# Altium PCB ORCS4.PcbDoc (part 2 of 2)
Units mm, origin at the board's own origin, x right, y up, seen from the top; angles counter-clockwise.
Board outline 75.18 x 74.8 mm, 2 copper layers (Top Layer, Bottom Layer); 94 components, 96 nets, 440 pads, 113 vias.
Unrouted connection lines stored in the file: 4.
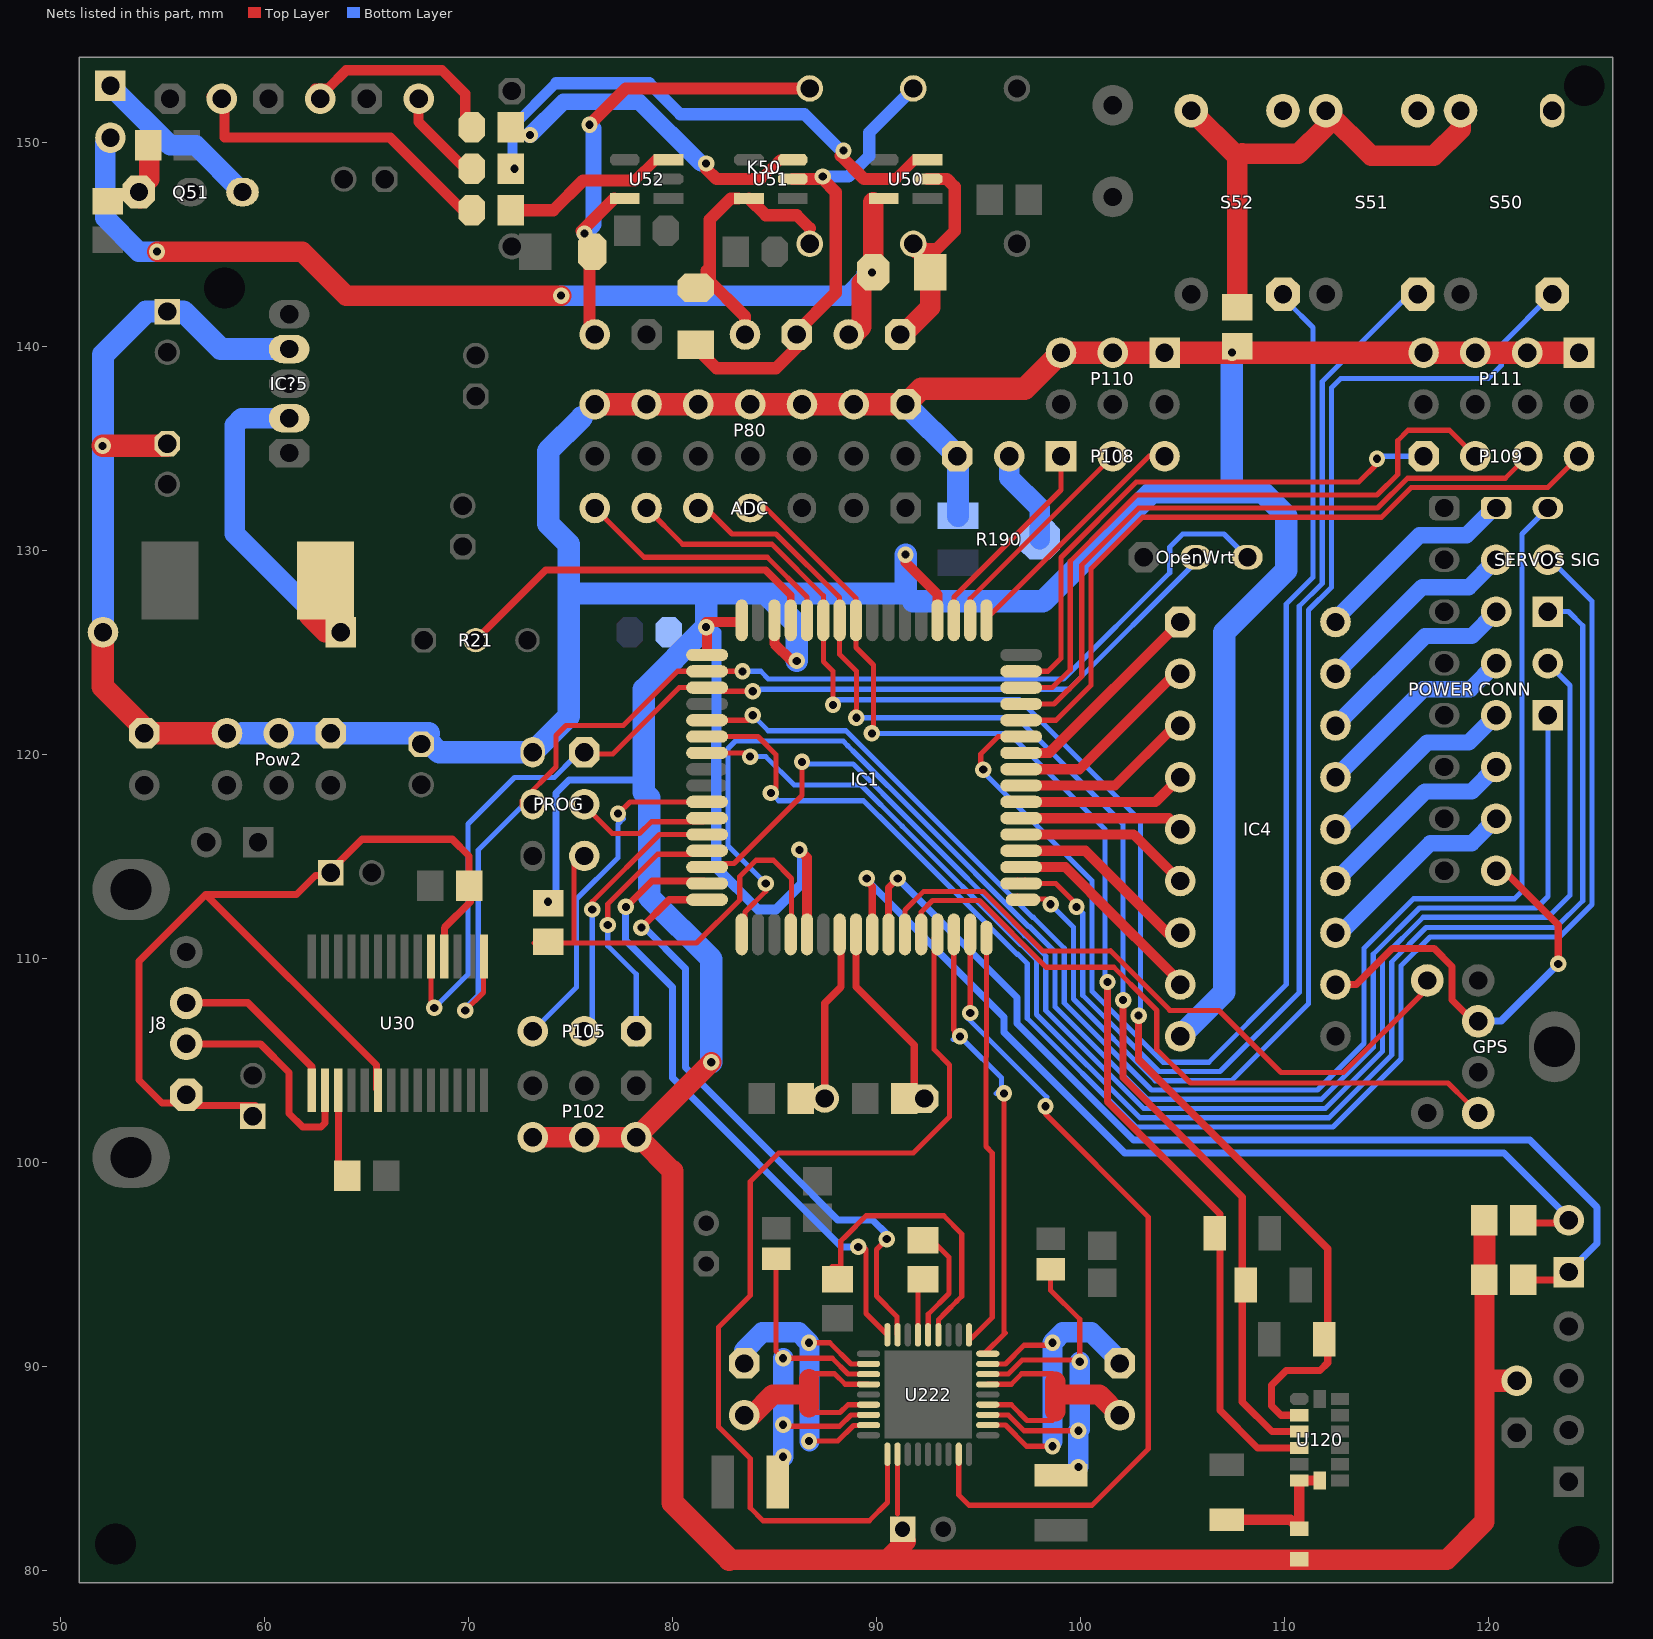
[diagram p2: the nets of this part, all layers, seen from the top]

## Via types
v1: diameter 0.8, hole 0.4, Top Layer to Bottom Layer, 97 vias
v2: diameter 0.66, hole 0.33, Top Layer to Bottom Layer, tented top, 16 vias

## Nets (pads, with @x,y where several pads share a name; then routed paths per layer and width w, separated by ;. In a path a pad name is that pad's centre, name@x,y a point inside that pad or via, vN(x,y) a via of type N, cw(c..) or ccw(c..) an arc to the next point about the centre after c; other vN are vias at no path point) (continued)
MEMSX: ADC.6 C201.1 IC1.59 U120.2 | length 70
  Top Layer w0.254: ADC.6@78.74,132.08 80.518,130.302 84.887,130.302 87.408,127.781 IC1.59@87.408,126.572 87.408,124.555 87.884,124.079 v1(87.884,122.428)
  Top Layer w0.35: v1(102.87,107.188) 102.87,105.029 108.585,99.314 112.141,95.758 112.141,90.17 111.76,89.789 110.109,89.789 109.385,89.065 109.385,88.062 109.855,87.592 U120.2@110.744,87.592
  Bottom Layer w0.254: v1(87.884,122.428) 88.138,122.682 97.028,122.682 102.997,116.713 ; v1(102.87,107.188) 102.99,107.188 102.962,107.541 102.962,116.713
MEMSY: ADC.5 C203.2 IC1.58 U120.3 | length 64.3
  Top Layer w0.254: ADC.5@81.28,132.08 81.661,132.08 82.931,130.81 85.09,130.81 88.208,127.692 IC1.58@88.208,126.572 88.208,124.898 89.027,124.079 89.027,122.174 88.9,122.047 v1@88.9,121.92
  Top Layer w0.35: v1@102.095,107.95 102.095,104.153 107.95,98.298 107.95,88.249 109.407,86.792 U120.3@110.744,86.792
  Bottom Layer w0.254: v1(89.027,121.793) 96.901,121.793 102.108,116.586 102.108,108.966 v1(102.108,107.95)
MEMSZ: ADC.4 C202.2 IC1.57 U120.4 | length 62.9
  Top Layer w0.254: ADC.4@83.82,132.08 84.582,132.08 89.008,127.654 IC1.57@89.008,126.572 89.008,125.241 89.867,124.382 89.867,121.219 v1@89.596,121.219
  Top Layer w0.35: v1@101.333,108.725 101.333,102.978 106.854,97.457 106.854,87.837 108.699,85.992 U120.4@110.744,85.992
  Bottom Layer w0.254: v1(89.789,121.031) 96.52,121.031 101.219,116.332 v1@101.219,108.966 ; v1(101.346,108.839) v1@101.6,108.839
Net5_1: 5.1 IC1.17 | length 75.3
  Top Layer w0.254: IC1.17@83.408,111.172 83.566,111.33 83.566,112.268 84.582,113.284 v1(84.582,113.665)
  Bottom Layer w0.254: v1(84.582,113.665) 82.731,115.516 82.731,120.286 83.095,120.65 88.385,120.65 88.608,120.427 89.034,120.001 92.183,116.852 97.472,111.563 97.512,111.563 98.768,110.307 98.768,107.628 103.307,103.089 111.831,103.089 114.373,105.631 114.373,110.203 116.638,112.468 122.374,112.468 122.936,113.03 5.1@122.936,121.92
Net5_2: 5.2 IC1.14 | length 72.8
  Top Layer w0.254: IC1.14@81.708,114.472 81.881,114.645 83.022,114.645 86.36,117.983 v1(86.36,119.634)
  Bottom Layer w0.254: v1(86.36,119.634) 86.471,119.523 88.87,119.523 91.729,116.664 97.284,111.109 97.324,111.109 98.314,110.119 98.314,107.44 103.119,102.635 112.019,102.635 114.827,105.443 114.827,110.015 116.826,112.014 122.936,112.014 124.013,113.091 124.013,123.383 5.2@122.936,124.46
NetC1_1: C1.1 IC1.24 XTAL.1 | length 9.4
  Top Layer w0.35: IC1.24@89.008,111.172 89.008,108.604 91.865,105.747 91.865,103.615 XTAL.1@92.356,103.124
NetC2_1: C2.1 IC1.23 XTAL.2 | length 8.4
  Top Layer w0.35: XTAL.2@87.476,103.124 87.476,107.796 88.265,108.585 88.265,111.115 IC1.23@88.208,111.172
NetC14_1: C14.1 C15.1 C16.1 J8.1 U30.4 U30.20 | length 49.9
  Top Layer w0.35: J8.1@56.17,103.307 55.765,102.902 54.975,102.902 53.848,104.029 53.848,109.855 57.127,113.134 ; J8.1@56.297,102.775 C15.1@59.563,102.775 ; U30.20@65.573,103.532 65.498,103.607 65.498,104.762 57.127,113.134 ; U30.4@68.823,110.082 68.823,111.495 70.104,112.776 70.104,113.488 C16.1@70.038,113.554 ; C16.1@69.839,113.355 C16.1@70.038,113.554 ; 57.127,113.134 61.572,113.134 62.5,114.062 63.008,114.062 64.786,115.84 69.215,115.84 70.038,115.017 C16.1@70.038,113.554
NetC17_1: C17.1 U30.17 | length 4.4
  Top Layer w0.35: U30.17@63.623,103.532 63.627,103.528 63.627,99.777 C17.1@64.074,99.33
NetC50_1: C50.1 U222.31 | length 13.9
  Top Layer w0.254: C50.1@87.849,94.895 88.265,94.895 88.265,96.132 88.519,96.386 89.507,97.374 93.31,97.374 94.199,96.485 94.199,93.945 94.199,93.43 93.952,93.183 93.444,92.675 93.048,92.279 U222.31@93.048,91.536
NetC51_1: C51.1 U222.33 | length 2.9
  Top Layer w0.254: C51.1@91.786,94.326 92.048,94.064 92.048,92.548 U222.33@92.048,91.536
NetC51_2: C51.2 U222.32 | length 5.8
  Top Layer w0.254: C51.2@92.294,96.165 92.741,96.165 93.564,95.342 93.564,93.952 93.564,93.564 92.548,92.548 U222.32@92.548,91.536
NetC63_1: C63.1 P300.2 P501.2 U50.5 | length 50.4
  Top Layer w0.6: C63.1@89.789,144.145 89.817,144.145 C63.1@89.857,144.185
  Top Layer w1: v1(54.737,144.653) 61.849,144.653 64.008,142.494 v1(74.549,142.494) ; P501.2@88.773,140.462 89.281,140.97 89.281,143.129 v1(89.789,143.637) ; C63.1@89.857,144.185 U50.5@89.857,147.066
  Bottom Layer w1: P300.2@52.451,150.241 52.197,149.987 52.197,146.304 53.848,144.653 v1(54.737,144.653) ; v1(74.549,142.494) 88.646,142.494 89.535,143.383 89.535,143.591 89.581,143.637 v1(89.789,143.637)
NetC63_2: C63.2 K50.11 P501.1 U50.2 | length 10.8
  Top Layer w0.35: C63.2@92.266,143.637 K50.11@92.266,144.589
  Top Layer w0.6: K50.11@92.075,144.78 92.964,144.78 93.853,145.669 93.853,147.828 93.472,148.209 U50.2@92.515,148.209
  Top Layer w1: P501.1@91.186,140.462 92.647,141.923 C63.2@92.647,143.637 ; K50.11@92.075,144.78 K50.11@92.266,144.589
NetC64_1: C64.1 K50.12 P502.2 U51.5 | length 14
  Top Layer w0.3: K50.12@86.741,145.034 86.741,145.796
  Top Layer w0.6: 81.694,143.731 81.694,143.35 83.566,141.478 P502.2@83.566,140.208 ; C64.1@81.788,142.748 81.84,142.8 81.84,146.229 82.87,147.259 U51.5@83.253,147.259 ; U51.5@83.761,147.259 84.589,146.431 86.106,146.431 86.741,145.796
NetC64_2: C64.2 K50.21 P502.1 U51.2 | length 23.9
  Top Layer w0.254: P502.1@86.36,140.208 P502.1@86.36,141.097
  Top Layer w0.6: C64.2@81.28,139.827 82.169,138.938 85.09,138.938 P502.1@86.36,140.208 ; U51.2@85.911,148.209 87.376,148.209 88.011,147.574 88.011,142.621 P502.1@86.042,140.653
  Bottom Layer w0.6: v1(87.376,148.336) 88.646,148.336 89.662,149.352 89.662,150.495 K50.21@91.821,152.654
NetC65_1: C65.1 K50.22 P503.2 U52.5 | length 23.8
  Top Layer w0.6: v1@75.566,145.668 U52.5@77.157,147.259 ; P503.2@75.946,140.208 C65.1@75.946,144.653 ; v1(75.946,150.876) 77.724,152.654 K50.22@86.741,152.654
  Bottom Layer w0.3: v1(75.946,150.876) v1@76.134,150.688
  Bottom Layer w0.8: v1(75.692,145.542) 76.134,145.984 v1@76.134,150.688
NetC200_2: C200.2 R200.1 U120.6 U120.7 | length 7.1
  Top Layer w0.5: C200.2@107.188,82.47 110.304,82.47 R200.1@110.744,82.03 U120.6@110.744,84.392 U120.7@111.744,84.392
NetD11_2: D11.2 IC?5.2 L1.1 | length 17.2
  Top Layer w1: D11.2@62.166,126.809 62.992,125.984 L1.1@63.737,125.984
  Bottom Layer w1: IC?5.2@61.214,136.476 58.879,136.476 58.547,136.144 58.547,130.81 63.373,125.984 L1.1@63.737,125.984
NetD50_2: D50.2 R50.2 | length 4.7
  Top Layer w0.5: D50.2@67.564,152.146 67.564,151.003 69.85,148.717 R50.2@70.17,148.717
NetD51_2: D51.2 R51.2 | length 10
  Top Layer w0.5: D51.2@62.484,152.654 63.119,152.654 64.008,153.543 68.707,153.543 69.85,152.4 69.85,151.069 R51.2@70.17,150.749
NetD52_2: D52.2 R52.2 | length 16.2
  Top Layer w0.5: D52.2@57.404,152.273 58.039,151.638 58.039,150.241 66.167,150.241 69.723,146.685 R52.2@70.17,146.685 ; R52.2@70.166,146.685 R52.2@70.166,147.01
NetDCMOTOR1_1: DCMOTOR1.1 U222.2 U222.8 | length 14.9
  Top Layer w0.254: v1@86.96,86.325 88.117,86.325 88.88,87.088 89.6,87.088 U222.8@89.623,87.111 ; v1@86.96,91.151 87.722,91.151 88.762,90.111 U222.2@89.623,90.111
  Bottom Layer w1: DCMOTOR1.1@83.531,90.516 83.531,90.77 84.42,91.659 86.198,91.659 v1(86.706,91.151) 86.73,91.127 v1@86.73,86.325
  other v1: 86.706,86.325
NetDCMOTOR1_2: DCMOTOR1.2 U222.4 U222.6 | length 12
  Top Layer w0.254: 86.706,87.976 86.452,87.722 88.23,87.722 88.619,88.111 U222.6@89.623,88.111 ; 86.706,89.373 86.452,89.627 87.962,89.627 88.478,89.111 U222.4@89.623,89.111
  Top Layer w1: DCMOTOR1.2@83.912,87.595 84.928,88.611 86.706,88.611 ; 86.706,87.976 86.706,89.373
NetDCMOTOR2_1: DCMOTOR2.1 U222.20 U222.26 | length 16.2
  Top Layer w0.254: U222.20@95.473,87.111 96.334,87.111 97.374,86.071 v1(98.644,86.071) ; U222.26@95.473,90.111 96.334,90.111 97.247,91.024 v1@98.644,91.024
  Bottom Layer w1: v1@98.644,86.325 v1(98.644,91.151) 99.152,91.659 100.549,91.659 DCMOTOR2.1@102.01,90.198
NetDCMOTOR2_2: DCMOTOR2.2 U222.22 U222.24 | length 13.1
  Top Layer w0.254: U222.22@95.473,88.111 96.618,88.111 97.388,87.341 98.644,87.341 98.644,87.787 ; U222.24@95.473,89.111 96.618,89.111 97.134,89.627 98.644,89.627 98.644,89.246 ; 98.644,88.23 98.644,88.357
  Top Layer w1: 98.771,87.787 98.771,88.611 ; 98.771,88.357 98.771,88.611 ; 98.771,89.246 98.771,88.611 ; DCMOTOR2.2@101.946,87.595 100.93,88.611 98.771,88.611
NetGPS_2: "POWER CONN.16" GPS.2 IC4.11 | length 21.8
  Top Layer w0.35: IC4.11@112.522,108.712 113.538,108.712 115.316,110.49 117.348,110.49 118.237,109.601 118.237,107.95 119.14,107.047 119.262,107.168 GPS.2@119.516,107.422 ; 120.396,114.681 120.587,114.49 123.444,111.633 v1(123.444,109.728)
  Bottom Layer w0.35: GPS.2@119.516,107.422 119.77,107.168 120.004,106.934 120.65,106.934 v1(123.444,109.728)
NetGPS_3: GPS.3 IC1.28 | length 33.9
  Top Layer w0.254: IC1.28@92.202,111.166 IC1.28@92.208,111.172 92.208,112.274 92.764,112.83 95.062,112.83 98.326,109.566 101.647,109.566 103.251,107.962 103.769,107.445 ; 103.759,107.435 103.759,106.725 103.759,105.537 105.41,103.886 118.044,103.886 119.008,102.922 GPS.3@119.516,102.922
NetGPS_6: GPS.6 IC1.27 | length 33.5
  Top Layer w0.254: IC1.27@91.408,111.172 91.408,112.363 92.329,113.284 95.25,113.284 98.171,110.363 101.473,110.363 ; 101.483,110.373 103.705,108.15 104.404,107.452 ; 104.394,107.442 105.41,107.442 106.807,107.442 109.855,104.394 112.903,104.394 116.762,108.253 116.762,108.914 116.762,109.168 GPS.6@117.016,109.422
NetI2C_1: I2C.1 IC1.26 R11.2 | length 50.8
  Top Layer w0.35: IC1.26@90.608,111.172 90.608,113.468 v1(91.059,113.919) ; R11.2@121.727,94.234 I2C.1@123.571,94.234
  Bottom Layer w0.35: v1(91.059,113.919) 96.904,108.074 96.904,106.804 102.616,101.092 121.412,101.092 ; 120.904,101.092 122.047,101.092 125.349,97.79 125.349,96.012 I2C.1@123.952,94.615
NetI2C_2: I2C.2 IC1.25 R10.2 | length 46.1
  Top Layer w0.35: v1@89.678,113.649 89.808,113.519 IC1.25@89.808,111.172 ; R10.2@122.362,97.028 123.571,97.028 I2C.2@124.079,97.536
  Bottom Layer w0.35: v1(89.535,113.919) 89.535,113.844 96.266,107.113 96.266,106.374 96.919,105.721 102.183,100.457 120.777,100.457 I2C.2@123.825,97.409
NetIC1_5: "SERVOS SIG.3" IC1.5 | length 75.3
  Top Layer w0.254: IC1.5@81.708,121.672 83.699,121.672 v1(83.947,121.92)
  Bottom Layer w0.254: v1(83.947,121.92) 84.709,121.158 88.519,121.158 89.062,120.615 89.488,120.189 92.637,117.04 97.66,112.017 97.7,112.017 99.222,110.495 99.222,107.816 103.495,103.543 111.643,103.543 113.919,105.819 113.919,110.49 116.351,112.922 121.304,112.922 121.666,113.284 121.666,130.81 122.936,132.08
NetIC1_6: "SERVOS SIG.2" IC1.6 | length 79.6
  Top Layer w0.254: IC1.6@81.708,120.872 84.196,120.872 85.09,119.978 85.09,118.364 v1(84.836,118.11)
  Bottom Layer w0.254: v1(84.836,118.11) 85.217,117.729 89.38,117.729 90.821,116.288 96.908,110.201 96.948,110.201 97.406,109.743 97.406,107.064 102.743,101.727 112.395,101.727 115.735,105.067 115.735,109.639 117.148,111.052 123.512,111.052 125.095,112.635 125.095,127.508 123.317,129.286 123.317,129.921
NetIC1_7: "SERVOS SIG.1" IC1.7 | length 74.5
  Top Layer w0.254: IC1.7@81.708,120.072 83.636,120.072 v1(83.82,119.888)
  Bottom Layer w0.254: v1(83.82,119.888) 84.582,119.888 85.979,118.491 89.26,118.491 91.275,116.476 97.096,110.655 97.136,110.655 97.86,109.931 97.86,107.252 102.931,102.181 112.207,102.181 115.281,105.255 115.281,109.827 116.96,111.506 123.324,111.506 124.641,112.823 124.641,126.311 123.952,127 122.936,127
NetIC1_10: IC1.10 P105.3 | length 17.8
  Top Layer w0.254: v1(77.343,117.094) 77.921,117.672 IC1.10@81.708,117.672
  Bottom Layer w0.254: P105.3@73.152,105.791 P105.3@73.152,106.426 ; P105.3@73.155,106.429 75.311,108.585 75.311,112.903 77.343,114.935 77.343,116.586 77.597,116.84 v1(77.343,117.094)
NetIC1_12: IC1.12 P105.2 | length 14.1
  Top Layer w0.254: v1(76.073,112.395) 76.073,112.776 79.369,116.072 IC1.12@81.708,116.072
  Bottom Layer w0.254: P105.2@75.692,105.791 P105.2@75.692,106.426 76.073,106.807 v1(76.073,112.395)
NetIC1_13: IC1.13 P105.1 | length 13.4
  Top Layer w0.254: v1(76.835,111.633) 76.835,112.661 79.273,115.099 81.535,115.099 IC1.13@81.708,115.272
  Bottom Layer w0.254: v1(76.835,111.633) 76.835,110.617 78.232,109.22 P105.1@78.232,106.426 P105.1@78.232,105.791
NetIC1_15: IC1.15 U222.36 | length 31.7
  Top Layer w0.254: v1(89.119,95.85) 89.373,95.85 89.5,95.723 89.5,92.584 U222.36@90.548,91.536
  Top Layer w0.35: v1(77.724,112.522) 78.999,113.797 81.583,113.797 IC1.15@81.708,113.672
  Bottom Layer w0.35: v1(77.724,112.522) 77.711,112.509 77.711,110.884 80.01,108.585 80.01,104.14 88.3,95.85 v1(89.119,95.85) v1@89.228,95.959
NetIC1_16: IC1.16 U222.35 | length 30.6
  Top Layer w0.254: v1(90.516,96.231) 90.008,95.723 90.008,93.437 91.025,92.42 91.025,91.559 U222.35@91.048,91.536
  Top Layer w0.35: v1(78.486,111.506) 79.852,112.872 81.244,112.872 IC1.16@81.708,112.872
  Bottom Layer w0.35: v1(78.486,111.506) 78.631,111.506 80.645,109.492 80.645,104.648 85.598,99.695 ; 85.725,99.568 85.598,99.695 ; v1(90.516,96.231) 90.516,96.485 89.826,97.175 88.118,97.175 85.598,99.695
NetIC1_29: IC1.29 U222.10 | length 47.4
  Top Layer w0.254: U222.10@90.548,85.686 90.548,83.309 89.662,82.423 84.455,82.423 83.82,83.058 83.82,85.471 82.261,87.03 82.261,91.913 83.82,93.472 83.82,99.06 85.217,100.457 91.821,100.457 93.599,102.235 93.599,104.775 92.837,105.537 92.837,111.001 IC1.29@93.008,111.172
NetIC1_30: IC1.30 U222.27 | length 23.2
  Top Layer w0.254: IC1.30@93.981,110.999 93.799,110.817 93.799,108.531 93.799,107.769 93.799,106.48 93.853,106.426 93.853,106.172 v1(94.107,106.172) ; U222.27@95.088,90.643 95.342,90.643 96.329,91.63 ; 96.266,91.63 v1(96.266,103.378)
  Bottom Layer w0.254: v1@93.759,106.012 94.267,106.012 94.361,105.918 96.139,104.14 96.139,103.632 95.885,103.378 v1(96.266,103.378) ; v1@93.853,106.172 v1(94.107,106.172)
NetIC1_31: IC1.31 U222.17 | length 41.3
  Top Layer w0.254: U222.17@94.048,85.686 94.048,83.682 94.545,83.185 100.584,83.185 103.343,85.944 103.343,97.317 98.298,102.362 v1(98.298,102.743) ; IC1.31@94.608,111.172 94.615,111.165 94.615,107.696 94.488,107.569 94.488,107.442 v1(94.615,107.315)
  Bottom Layer w0.254: v1(94.615,107.315) 94.488,107.188 94.488,107.061 98.361,103.188
NetIC1_32: IC1.32 U222.28 | length 20.3
  Top Layer w0.254: U222.28@94.693,91.391 95.688,92.386 95.688,100.457 95.377,100.768 95.377,105.156 95.408,105.187 IC1.32@95.408,111 IC1.32@95.408,111.172
NetIC1_35: IC1.35 IC4.8 | length 10.4
  Top Layer w0.254: 100.549,113.192 100.549,113.204 ; IC4.8@104.902,108.839 IC4.8@105.156,108.839
  Top Layer w0.5: IC1.35@97.108,114.472 99.281,114.472 100.549,113.204 ; 100.549,113.192 IC4.8@104.902,108.839
NetIC1_36: IC1.36 IC4.7 | length 9.5
  Top Layer w0.254: IC4.7@104.267,111.252 IC4.7@104.902,111.252
  Top Layer w0.5: IC1.36@97.108,115.272 100.247,115.272 IC4.7@104.267,111.252
NetIC1_37: IC1.37 IC4.6 | length 8.7
  Top Layer w0.5: IC1.37@97.108,116.072 102.622,116.072 IC4.6@104.902,113.792
NetIC1_38: IC1.38 IC4.5 | length 8
  Top Layer w0.254: 104.362,116.872 IC4.5@104.902,116.332
  Top Layer w0.5: IC1.38@97.108,116.872 104.362,116.872
NetIC1_39: IC1.39 IC4.4 | length 8.3
  Top Layer w0.5: IC1.39@97.108,117.672 103.702,117.672 IC4.4@104.902,118.872
NetIC1_40: IC1.40 IC4.3 | length 9
  Top Layer w0.254: IC4.3@104.648,121.412 IC4.3@104.902,121.412
  Top Layer w0.5: IC1.40@97.108,118.472 101.708,118.472 IC4.3@104.648,121.412
NetIC1_41: IC1.41 IC4.2 | length 9.7
  Top Layer w0.254: IC4.2@104.648,123.952 IC4.2@104.902,123.952
  Top Layer w0.5: IC1.41@97.108,119.272 99.968,119.272 IC4.2@104.648,123.952
NetIC1_42: IC1.42 IC4.1 | length 10.5
  Top Layer w0.5: IC1.42@97.108,120.072 98.482,120.072 IC4.1@104.902,126.492
NetIC1_44: IC1.44 P109.4 | length 36.1
  Top Layer w0.254: IC1.44@97.108,121.672 98.812,121.672 100.53,123.39 100.53,129.098 103.058,131.626 114.772,131.626 116.235,133.089 122.929,133.089 P109.4@124.46,134.62
NetIC1_45: IC1.45 P109.3 | length 33
  Top Layer w0.254: IC1.45@97.108,122.472 98.723,122.472 100.076,123.825 100.076,129.286 102.87,132.08 114.583,132.08 116.046,133.543 120.843,133.543 P109.3@121.92,134.62
NetIC1_46: IC1.46 P109.2 | length 32.1
  Top Layer w0.254: IC1.46@97.108,123.272 98.634,123.272 99.514,124.152 99.514,129.472 102.757,132.715 114.554,132.715 115.57,133.731 115.57,135.382 116.078,135.89 118.11,135.89 P109.2@119.38,134.62
NetIC1_47: IC1.47 P109.1 | length 27.1
  Top Layer w0.254: IC1.47@97.108,124.072 98.418,124.072 99.06,124.714 99.06,129.66 102.75,133.35 113.665,133.35 114.554,134.239 v1(114.554,134.493)
  Bottom Layer w0.254: v1(114.554,134.493) 114.681,134.62 P109.1@116.84,134.62
NetIC1_49: IC1.49 P108.3 | length 12
  Top Layer w0.254: IC1.49@95.408,126.772 95.53,126.772 103.378,134.62 P108.3@104.14,134.62
NetIC1_50: IC1.50 P108.2 | length 10.9
  Top Layer w0.254: IC1.50@94.608,126.572 94.608,127.628 P108.2@101.6,134.62
NetIC1_51: IC1.51 P108.1 | length 10.2
  Top Layer w0.254: IC1.51@93.808,126.572 93.808,127.717 99.06,132.969 P108.1@99.06,134.62
NetIC1_61: IC1.61 R21.2 | length 18.7
  Top Layer w0.35: R21.2@70.485,125.476 70.485,125.73 73.787,129.032 84.582,129.032 85.808,127.806 IC1.61@85.808,126.572
NetIC4_12: "POWER CONN.14" IC4.12 | length 10.2
  Bottom Layer w0.5: IC4.12@112.522,111.252 IC4.12@112.776,111.252
  Bottom Layer w0.8: IC4.12@112.776,111.252 117.164,115.64 119.196,115.64 120.396,116.84
NetIC4_13: "POWER CONN.12" IC4.13 | length 10.2
  Bottom Layer w0.8: IC4.13@112.522,113.792 116.91,118.18 119.196,118.18 120.396,119.38
NetIC4_14: "POWER CONN.10" IC4.14 | length 10.2
  Bottom Layer w0.5: IC4.14@112.522,116.332 IC4.14@112.776,116.332
  Bottom Layer w0.8: IC4.14@112.776,116.332 117.024,120.58 118.503,120.58 119.056,120.58 120.396,121.92
NetIC4_15: "POWER CONN.8" IC4.15 | length 10.2
  Bottom Layer w0.8: IC4.15@112.522,118.872 116.84,123.19 119.126,123.19 120.396,124.46
NetIC4_16: "POWER CONN.6" IC4.16 | length 10.2
  Bottom Layer w0.8: IC4.16@112.522,121.412 116.91,125.8 119.196,125.8 120.396,127
NetIC4_17: "POWER CONN.4" IC4.17 | length 10.2
  Bottom Layer w0.8: IC4.17@112.522,123.952 116.713,128.143 116.77,128.2 118.503,128.2 119.056,128.2 120.396,129.54
NetIC4_18: "POWER CONN.2" IC4.18 | length 10.9
  Bottom Layer w0.5: IC4.18@112.141,126.619 112.522,126.619 IC4.18@112.903,126.619
  Bottom Layer w0.8: IC4.18@112.522,126.619 116.643,130.74 118.942,130.74 120.282,132.08 120.396,132.08
NetJ8_2: J8.2 U30.16 | length 11.6
  Top Layer w0.35: J8.2@56.17,105.807 59.801,105.807 61.214,104.394 61.214,102.396 61.883,101.727 62.771,101.727 62.973,101.929 U30.16@62.973,103.532
  Bottom Layer w0.35: J8.2@56.297,105.442 56.531,105.442 J8.2@56.533,105.444
NetJ8_3: J8.3 U30.15 | length 8.7
  Top Layer w0.35: J8.3@56.17,107.807 56.186,107.823 59.182,107.823 62.323,104.682 U30.15@62.323,103.532 ; J8.3@56.297,107.442 J8.3@56.329,107.474
NetP300_1: P300.1 Q51.3 | length 8.6
  Bottom Layer w1: P300.1@52.451,152.781 55.372,149.86 56.642,149.86 Q51.3@58.928,147.574
NetQ51_1: Q51.1 R53.1 R54.2 | length 2.4
  Top Layer w1: Q51.1@53.914,147.259 53.914,147.767 54.356,148.209 R54.2@54.356,149.479
NetR14_2: R14.2 R150.2 U222.21 U222.25 | length 19.6
  Top Layer w0.254: U222.21@95.473,87.611 96.476,87.611 97.254,86.833 v1(99.914,86.833) ; U222.25@95.473,89.611 96.476,89.611 97.162,90.297 v1@99.787,90.297 ; R150.2@98.552,94.754 98.552,93.726 99.979,92.299 v1(99.979,90.214)
  Bottom Layer w1: v1(99.914,85.055) v1(99.914,86.833) ; v1@99.979,86.898 v1(99.979,90.214)
NetR15_2: R15.2 R151.2 U222.3 U222.7 | length 18.3
  Top Layer w0.254: R151.2@85.09,95.262 85.09,90.735 v1(85.436,90.389) 87.842,90.389 88.62,89.611 U222.3@89.623,89.611 ; v1@85.598,87.052 88.202,87.052 88.761,87.611 U222.7@89.281,87.611
  Bottom Layer w1: v1(85.436,85.563) v1(85.436,87.131) v1(85.436,90.389)
NetR50_1: R50.1 U50.3 | length 26.2
  Top Layer w0.3: R50.1@72.07,148.717 v1(72.263,148.717) ; v1@88.265,149.352 88.265,149.479 v1(88.392,149.606) ; U50.3@91.882,149.159 U50.3@92.515,149.159
  Top Layer w0.5: 90.932,148.209 U50.3@91.882,149.159
  Top Layer w0.6: v1@88.265,149.352 89.408,148.209 90.932,148.209
  Bottom Layer w0.3: v1@72.167,148.813 v1(72.263,148.717) ; v1@88.265,149.606 v1(88.392,149.606)
  Bottom Layer w0.5: v1@72.167,148.813 72.167,150.78 74.295,152.908
  Bottom Layer w0.6: 74.295,152.908 78.867,152.908 80.391,151.384 86.487,151.384 v1@88.265,149.606
NetR51_1: R51.1 U51.3 | length 16.8
  Top Layer w0.3: R51.1@72.07,150.749 72.451,150.368 v1(73.025,150.368) ; v1@81.661,148.717 v1(81.661,148.971) ; U51.3@85.278,149.159 U51.3@85.911,149.159
  Top Layer w0.5: 84.328,148.209 U51.3@85.278,149.159
  Top Layer w0.6: v1@81.661,148.717 82.169,148.209 84.328,148.209
  Bottom Layer w0.3: v1@81.407,148.971 v1(81.661,148.971)
  Bottom Layer w0.8: v1(73.025,150.368) 74.665,152.008 78.37,152.008 v1@81.407,148.971
NetR52_1: R52.1 U52.3 | length 8.8
  Top Layer w0.3: U52.3@79.182,149.159 U52.3@79.815,149.159
  Top Layer w0.5: 78.168,148.145 U52.3@79.182,149.159
  Top Layer w0.6: R52.1@72.07,146.685 74.168,146.685 75.629,148.145 78.168,148.145
NetR99_2: R99.2 S50.2 S50.4 S51.2 S51.4 S52.2 S52.4 | length 25
  Top Layer w1: S52.4@105.446,151.566 107.696,149.316 107.823,149.443 110.708,149.443 112.05,150.785 S51.4@112.05,151.566 114.264,149.352 117.348,149.352 118.654,150.658 S50.4@118.654,151.566 ; R99.2@107.696,142.494 107.696,149.225 107.95,149.479
RESET: IC1.20 PROG.5 R8.2 | length 22.1
  Top Layer w0.254: R8.2@73.218,110.744 81.192,110.744 83.312,112.864 83.312,114.009 84.111,114.808 84.963,114.808 85.852,113.919 85.852,111.216 IC1.20@85.808,111.172 ; 75.184,110.744 PROG.5@75.184,114.765
RXD: IC1.2 OpenWrt.3 PROG.4 U30.1 | length 58.3
  Top Layer w0.254: v1(69.85,107.442) 70.739,108.331 U30.1@70.739,110.048 ; PROG.4@72.644,117.475 72.644,117.729 74.295,119.38 74.295,120.919 74.788,121.412 77.597,121.412 80.257,124.072 IC1.2@81.708,124.072 v1(83.446,124.072)
  Bottom Layer w0.254: v1@69.723,107.442 70.485,108.204 70.485,115.316 PROG.4@72.644,117.475 ; v1(83.446,124.072) 84.335,124.072 84.709,123.698 99.187,123.698 104.394,128.905 104.394,130.175 105.029,130.81 107.061,130.81 OpenWrt.3@108.521,129.35
SCK: IC1.11 PROG.3 | length 7.3
  Top Layer w0.254: PROG.3@75.184,117.305 75.862,117.305 77.054,116.113 78.394,116.113 78.98,116.699 81.535,116.699 IC1.11@81.708,116.872
SW1: IC1.33 S50.1 | length 66.2
  Top Layer w0.254: IC1.33@96.519,112.903 98.298,112.903 v1(98.552,112.649) ; IC1.33@96.935,113.045 IC1.33@97.108,112.872
  Bottom Layer w0.254: v1(98.552,112.649) 99.676,111.525 99.676,108.004 103.683,103.997 107.426,103.997 111.198,107.769 111.198,127.073 112.322,128.197 112.322,137.976 112.776,138.43 120.015,138.43 120.65,139.065 120.65,140.081 S50.1@123.144,142.575
SW2: IC1.34 S51.1 | length 57.9
  Top Layer w0.254: IC1.34@96.935,113.845 IC1.34@97.108,113.672 ; IC1.34@97.282,113.845 97.462,113.665 98.806,113.665 v1@99.885,112.585 ; v1@99.949,112.649 v1@99.949,112.776
  Bottom Layer w0.254: v1@99.81,112.788 v1@99.949,112.649 ; v1@99.964,112.38 100.13,112.214 100.13,108.192 103.871,104.451 106.864,104.451 110.744,108.331 110.744,127.261 111.868,128.385 111.868,138.284 S51.1@115.969,142.385
  other v1: 99.822,112.522
SW3: IC1.43 S52.1 | length 63.6
  Top Layer w0.254: v1(95.25,119.253) 95.123,119.38 95.123,120.015 95.98,120.872 IC1.43@97.108,120.872
  Bottom Layer w0.254: v1(95.25,119.253) 95.25,119.133 100.584,113.799 100.584,108.38 104.059,104.905 106.302,104.905 110.109,108.712 110.109,127.381 111.414,128.686 111.414,140.935 S52.1@110.2,142.149 ; S52.1@109.946,142.566 S52.1@109.946,142.875
TXD: IC1.3 OpenWrt.2 PROG.1 U30.5 | length 53.6
  Top Layer w0.254: U30.5@68.173,110.082 68.173,107.722 v1(68.326,107.569) ; PROG.1@75.692,120.015 77.082,120.015 80.339,123.272 IC1.3@81.708,123.272 81.881,123.099 v1(83.947,123.099)
  Bottom Layer w0.254: v1(68.326,107.569) 69.977,109.22 69.977,116.586 72.263,118.872 74.211,118.872 PROG.1@75.184,119.845 ; v1(83.947,123.099) 84.11,122.936 84.364,123.19 99.441,123.19 105.664,129.413 105.664,129.54 OpenWrt.2@105.664,130.048
ULTRASONIC: ADC.7 IC1.60 | length 13.4
  Top Layer w0.254: ADC.7@76.2,132.08 78.613,129.667 84.657,129.667 86.608,127.716 IC1.60@86.608,126.572
VCC: AP_POWER.1 C6.1 C7.1 C53.1 C54.1 C56.1 IC1.1 IC1.21 IC1.52 IC1.62 IC1.64 IC4.9 IC?5.4 L1.2 P80.1 P80.2 P80.3 P80.4 P80.5 P80.6 P80.7 P102.2 P102.4 P102.6 P110.1 P110.3 P110.5 P111.1 P111.3 P111.5 P111.7 P112.1 P200.2 Pow2.1 Pow2.3 Pow2.5 PROG.2 R8.1 R10.1 R11.1 R99.1 R190.CCW R200.2 U222.11 | length 366.4
  Top Layer w0.254: 91.048,82.761 U222.11@91.048,85.686
  Top Layer w0.5: v1@81.661,126.492 83.328,126.492 IC1.64@83.408,126.572 ; IC1.1@81.708,124.872 v1@81.708,126.238 ; IC1.62@85.008,126.572 85.008,125.431 85.854,124.585 v1(86.106,124.585) ; v1(86.233,115.316) 86.608,114.941 IC1.21@86.608,111.172 ; v1@91.44,129.413 93.008,127.845 IC1.52@93.008,126.572
  Top Layer w1: P102.6@73.152,101.219 P102.4@75.692,101.219 78.359,101.219 80.01,99.568 ; P102.2@78.232,101.219 v1(81.915,104.902) ; 82.804,80.518 90.551,80.518 ; C56.1@91.44,81.407 90.551,80.518 ; R11.1@119.827,94.234 119.827,82.362 117.983,80.518 90.551,80.518
  Top Layer w1.1: L1.2@52.07,125.967 52.07,123.317 54.356,121.031 54.864,121.031 Pow2.5@58.166,121.031 ; v1(52.07,135.128) C6.1@55.245,135.128 ; P80.7@76.2,137.16 P80.6@78.74,137.16 P80.5@81.28,137.16 P80.4@83.82,137.16 P80.3@86.36,137.16 P80.2@88.9,137.16 P80.1@91.44,137.16 92.202,137.922 97.282,137.922 P110.5@99.06,139.7 P110.3@101.6,139.7 P110.1@104.14,139.7 P111.7@116.84,139.7 P111.5@119.38,139.7 P111.3@121.92,139.7 P111.1@124.46,139.7 ; 80.01,99.568 80.01,83.312 82.804,80.518 ; 119.888,89.281 P200.2@121.412,89.281 ; R11.1@119.827,94.234 R10.1@119.827,97.155 R11.1@119.827,94.234
  Bottom Layer w0.35: v1(73.914,112.776) 74.041,112.649 74.295,112.903 74.295,118.11 74.93,118.745 78.606,118.745
  Bottom Layer w0.5: 82.154,120.525 82.154,114.442 84.201,112.395 85.09,112.395 86.36,113.665 86.36,115.189 v1(86.233,115.316) ; 82.169,120.54 82.169,125.984
  Bottom Layer w1.1: L1.2@52.087,125.984 52.087,139.59 54.213,141.716 56.023,141.716 57.863,139.876 IC?5.4@61.214,139.876 ; 58.928,121.031 61.468,121.031 64.008,121.031 68.056,121.031 C54.1@68.072,121.015 ; C54.1@67.961,120.904 67.961,120.703 68.565,120.099 PROG.2@73.152,120.099 74.93,121.877 74.93,127.889 ; 75.565,136.525 73.914,134.874 73.914,131.318 74.93,130.302 74.93,127.889 ; v1(81.915,104.902) 81.915,109.957 78.867,113.005 78.867,117.881 78.606,118.142 78.606,118.745 78.606,123.183 v1(81.661,126.238) 81.661,127.889 ; v1(86.106,124.585) 86.106,126.363 84.58,127.889 ; v1(91.44,129.794) 91.44,127.889 84.58,127.889 ; P80.1@91.44,137.16 P112.1@93.98,134.62 94.012,134.588 R190.CCW@94.012,131.706 ; 91.821,127.508 98.171,127.508 103.505,132.842 107.442,132.842 ; IC4.9@104.902,106.172 107.061,108.331 107.061,125.984 110.109,129.032 110.109,131.699 108.966,132.842 107.442,132.842 ; v1(107.442,139.7) 107.442,132.842 ; 74.93,127.889 81.661,127.889 ; 81.661,127.889 84.58,127.889
VO: P112.2 R190.W | length 4.7
  Bottom Layer w1: P112.2@96.52,134.62 96.52,133.572 98.012,132.08 R190.W@98.012,130.556
pads on no net: GPS.4 GPS.5 GPS.S IC1.4 IC1.48 J8.5 J8.6 S50.3 S51.3 S52.3 U30.2 U30.3 U30.6 U30.8 U30.9 U30.10 U30.11 U30.12 U30.13 U30.14 U30.19 U30.22 U30.23 U30.24 U30.27 U30.28 U50.1 U51.1 U52.1 U120.1 U120.8 U120.9 U120.10 U120.11 U120.12 U120.13 U120.14 U222.1 U222.9 U222.12 U222.13 U222.14 U222.15 U222.19 U222.29 U222.37
copper on no net:
  other v2: 90.748,86.811 91.948,86.811 93.148,86.811 94.348,86.811 90.748,88.011 91.948,88.011 93.148,88.011 94.348,88.011 90.748,89.211 91.948,89.211 93.148,89.211 94.348,89.211 90.748,90.411 91.948,90.411 93.148,90.411 94.348,90.411

## Keep-outs
Keep-Out Layer:
  the board outline again, w0.3

## Silkscreen, mask and mechanical layers (free items; w line width, h text height)
Top Overlay:
  text "+" at 66.167,147.447 h1
  text "+" at 96.774,140.208 h1
  text "+" at 114.427,139.7 h1
  text "+" at 92.837,138.43 h1
  text "M1" at 90.678,132.969 h0.7 r90
  text "MX" at 77.978,132.842 h0.7 r90
  text "MIC" at 85.598,132.842 h0.7 r90
  text "M2" at 88.011,132.842 h0.7 r90
  text "MY" at 80.518,132.715 h0.7 r90
  text "MZ" at 83.058,132.715 h0.7 r90
  text "USON" at 75.311,132.461 h0.7 r90
  text "ST" at 124.587,131.826 h0.7
  text "SH" at 124.587,129.286 h0.7
  text "SV" at 124.587,126.746 h0.7
  text "BATT" at 69.723,126.238 h0.7 r90
  text "ORCS-FW" at 88.519,123.317 h1
  text "MICL" at 125.222,123.317 h0.7 r90
  text "+" at 55.372,122.555 h1
  text "+" at 67.183,121.539 h1
  text "MIC" at 123.952,121.539 h0.7
  text "LINFRA" at 121.92,119.126 h0.7
  text "LLED" at 121.92,117.094 h0.7
  text "LLASER" at 121.92,115.951 h0.7
  text "+12" at 55.753,114.554 h1 r90
  text "GPS" at 122.047,114.046 h0.7
  text "+" at 120.142,111.506 h1
  text "+" at 80.01,100.711 h1
  text "INFRA1" at 73.533,95.885 h0.7 r90
  text "INFRA2" at 76.073,95.631 h0.7 r90
  text "+" at 118.872,87.249 h1
  text "ORCS-FW G4" at 54.356,80.899 h1
  text "www.orcs.sebsoft.com" at 54.356,79.756 h1
Drill Drawing:
  text ".LEGEND" at 128.524,95.123 h1.52
  text "Drill Drawing." at 127.254,92.71 h1.52

## Text inside footprints (layer, text, board x,y; h text height)
C5: Top Overlay "+" at 69.088,129.794 h1.5 r90
C6: Top Overlay "+" at 55.88,135.763 h1.5 r270
C7: Top Overlay "+" at 56.007,142.24 h1.5 r270
C12: Top Overlay "+" at 67.056,146.05 h1.5 r180
C14: Top Overlay "+" at 62.865,114.824 h1.5
C15: Top Overlay "+" at 58.801,101.854 h1.5 r90
C19: Top Overlay "+" at 69.723,137.16 h1.5 r90
C54: Top Overlay "+" at 68.326,120.904 h1.5 r270
C55: Top Overlay "+" at 81.026,94.615 h1.5 r90
C56: Top Overlay "+" at 90.897,82.642 h1.5
IC?5: Top Overlay "1" at 59.817,134.239 h1; Top Overlay "3" at 60.071,137.668 h1; Top Overlay "5" at 60.071,141.097 h1
P80: Top Overlay "1" at 93.345,137.922 h0.8 r180
P102: Top Overlay "1" at 80.264,104.267 h1.27 r180
P110: Top Overlay "1" at 106.172,140.208 h0.8 r180
P111: Top Overlay "1" at 123.317,140.335 h0.8 r180
Pow2: Top Overlay "1" at 65.024,122.682 h0.8 r180
PROG: Bottom Overlay "1" at 77.597,120.269 h0.8
Q51: Bottom Overlay "3" at 59.69,146.812 h1 r180; Bottom Overlay "1" at 55.372,145.796 h1; Bottom Overlay "2" at 57.912,145.796 h1